# EAGLE board mbhp_core_stm32_R1b (EAGLE 5.04)
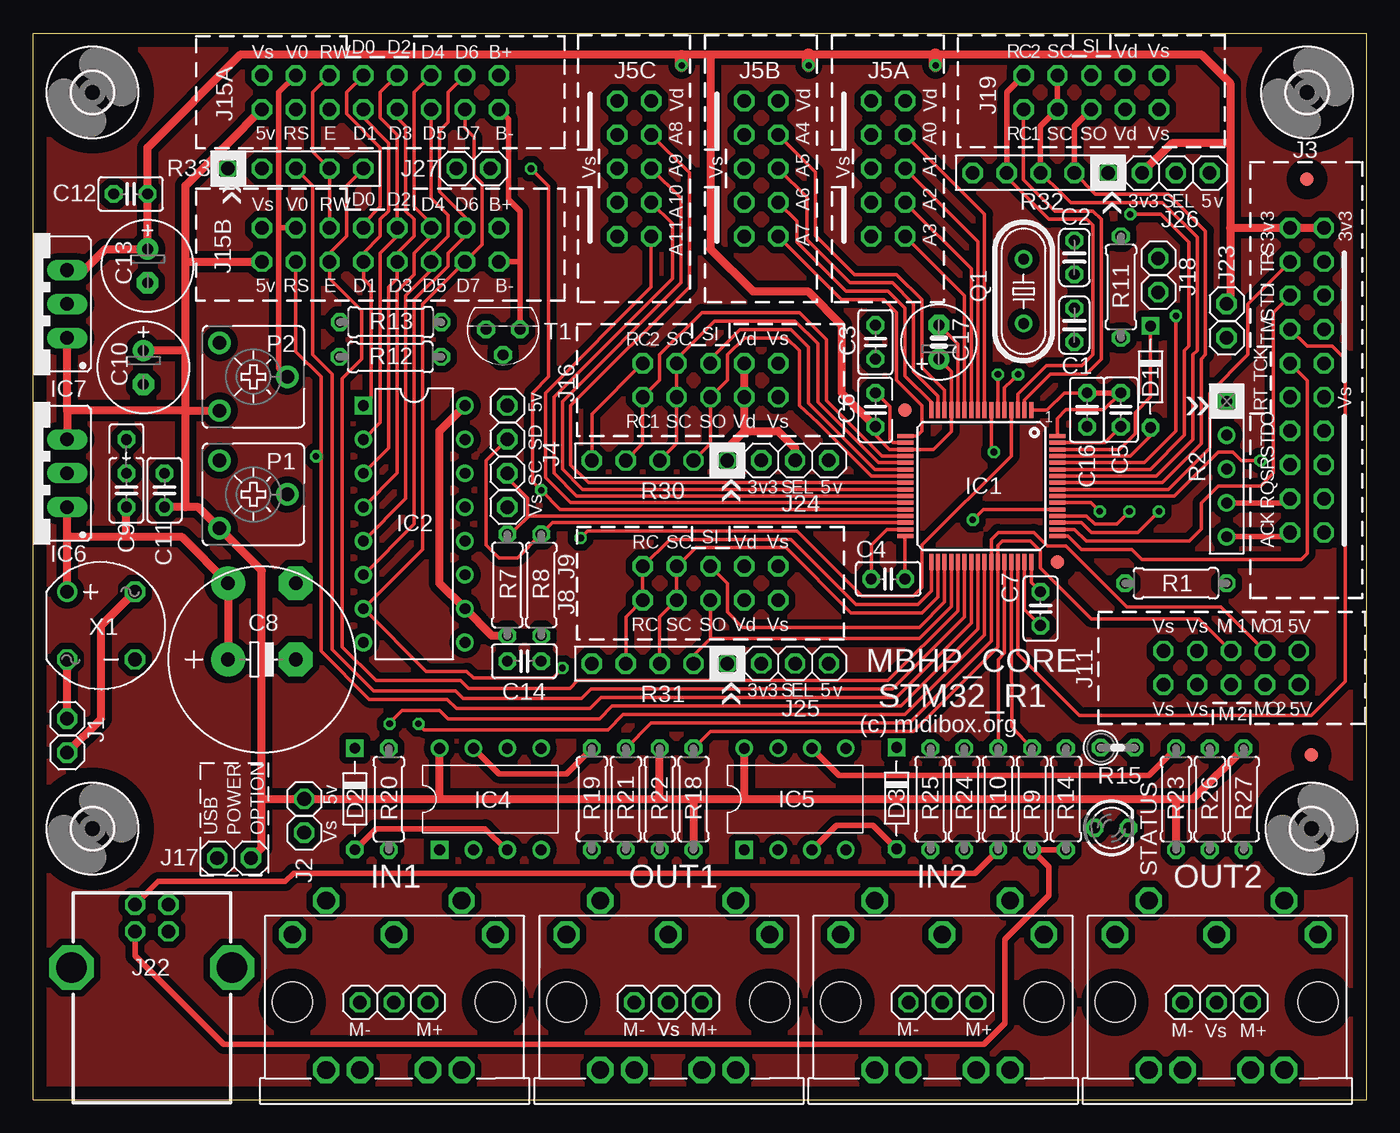
[diagram p0: board, top side]
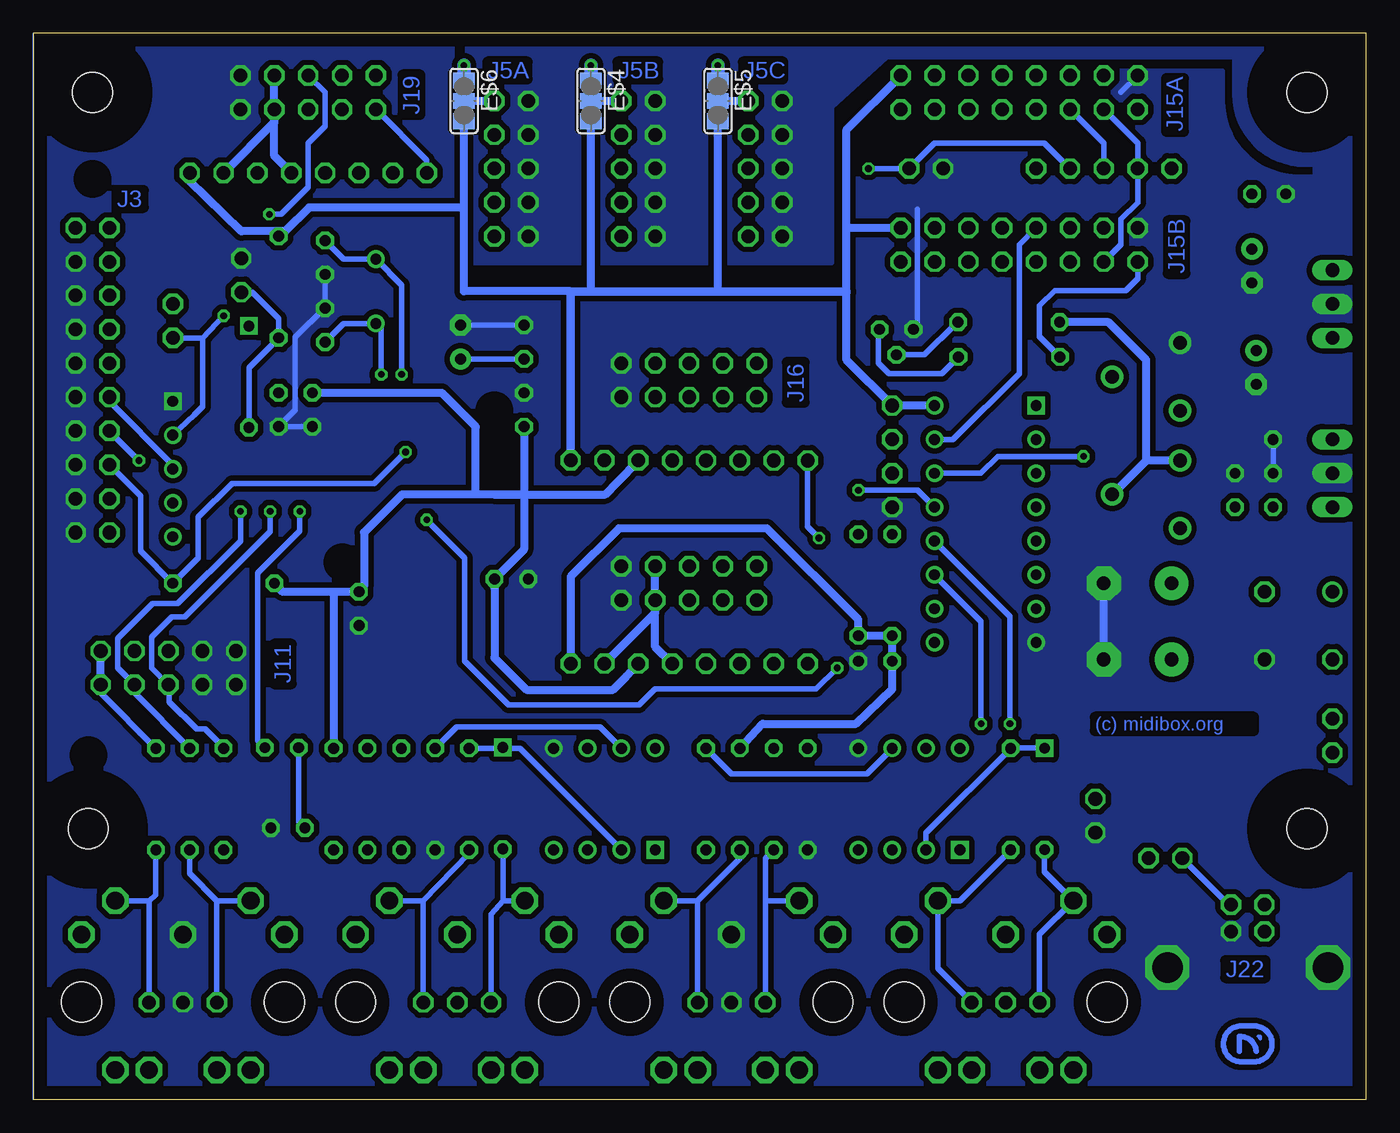
[diagram p1: board, bottom side, seen from below]

Size 100 x 80 mm. Coordinates in mm from the lower left corner, seen from the top.
Outline: 0,0 0,80 100,80 100,0 0,0
Copper layers (1*16): Top 0.035mm / dielectric 1.5mm / Bottom 0.035mm
Design rules "default *": minimum track width 10mil, minimum drill 18mil, track to track 8mil, track to pad 8mil, pad to pad 8mil, via to via 8mil, smd to smd 8mil, copper to edge 40mil, drill to drill 8mil, minimum pad ring 10mil, minimum via ring 8mil, stop-mask expansion 4mil, vias tented up to drill 25mil, thermal gap 10mil

## Footprints (pad centres in the part's own frame; a part is rotated, then mirrored left to right if it is on the bottom)
C025-024X044 = drill 0.813 octagon: 1 -1.27,0; 2 1.27,0
C025-025X050 = drill 0.813 octagon: 1 -1.27,0; 2 1.27,0
C025_050-025X075_EDIT = drill 0.813 octagon: 1 -1.27,0; 2 1.27,0
E5-13 = drill 1.016 pad 2.54 round: + -2.54,0 | drill 1.016 pad 2.54 octagon: - 2.54,0
E2,5-7 = drill 0.813 pad 1.6 round: + -1.27,0 | drill 0.813 pad 1.6 octagon: - 1.27,0
E2,5-6 = drill 0.813 pad 1.6 round: + -1.27,0 | drill 0.813 pad 1.6 octagon: - 1.27,0
D-7EDIT4148 = drill 0.813 octagon: NS 3.81,0 | drill 0.813 square: S -3.81,0
2X05NOSILK = drill 1.016 octagon: 1 -5.08,-1.27; 2 -5.08,1.27; 3 -2.54,-1.27; 4 -2.54,1.27; 5 0,-1.27; 6 0,1.27; 7 2.54,-1.27; 8 2.54,1.27; 9 5.08,-1.27; 10 5.08,1.27
SJ_2 = smd 1.168 x 1.6: 1 -1.524,0; 2 0,0; 3 1.524,0
2X08NOSILK = drill 1.016 octagon: 1 -8.89,-1.27; 2 -8.89,1.27; 3 -6.35,-1.27; 4 -6.35,1.27; 5 -3.81,-1.27; 6 -3.81,1.27; 7 -1.27,-1.27; 8 -1.27,1.27; 9 1.27,-1.27; 10 1.27,1.27; 11 3.81,-1.27; 12 3.81,1.27; 13 6.35,-1.27; 14 6.35,1.27; 15 8.89,-1.27; 16 8.89,1.27
2X10NOSILK = drill 1.016 octagon: 1 -11.43,-1.27; 2 -11.43,1.27; 3 -8.89,-1.27; 4 -8.89,1.27; 5 -6.35,-1.27; 6 -6.35,1.27; 7 -3.81,-1.27; 8 -3.81,1.27; 9 -1.27,-1.27; 10 -1.27,1.27; 11 1.27,-1.27; 12 1.27,1.27; 13 3.81,-1.27; 14 3.81,1.27; 15 6.35,-1.27; 16 6.35,1.27; 17 8.89,-1.27; 18 8.89,1.27; 19 11.43,-1.27; 20 11.43,1.27
1X01 = drill 1.016 octagon: 1 0,0
C025_050-025X075 = drill 0.813 octagon: 1 -1.27,0; 2 1.27,0; 3 3.81,0
TQFP64 = smd 1.2 x 0.3: 1 -5.7,3.75; 2 -5.7,3.25; 3 -5.7,2.75; 4 -5.7,2.25; 5 -5.7,1.75; 6 -5.7,1.25; 7 -5.7,0.75; 8 -5.7,0.25; 9 -5.7,-0.25; 10 -5.7,-0.75; 11 -5.7,-1.25; 12 -5.7,-1.75; 13 -5.7,-2.25; 14 -5.7,-2.75; 15 -5.7,-3.25; 16 -5.7,-3.75; 33 5.7,-3.75; 34 5.7,-3.25; 35 5.7,-2.75; 36 5.7,-2.25; 37 5.7,-1.75; 38 5.7,-1.25; 39 5.7,-0.75; 40 5.7,-0.25; 41 5.7,0.25; 42 5.7,0.75; 43 5.7,1.25; 44 5.7,1.75; 45 5.7,2.25; 46 5.7,2.75; 47 5.7,3.25; 48 5.7,3.75 | smd 0.3 x 1.2: 17 -3.75,-5.7; 18 -3.25,-5.7; 19 -2.75,-5.7; 20 -2.25,-5.7; 21 -1.75,-5.7; 22 -1.25,-5.7; 23 -0.75,-5.7; 24 -0.25,-5.7; 25 0.25,-5.7; 26 0.75,-5.7; 27 1.25,-5.7; 28 1.75,-5.7; 29 2.25,-5.7; 30 2.75,-5.7; 31 3.25,-5.7; 32 3.75,-5.7; 49 3.75,5.7; 50 3.25,5.7; 51 2.75,5.7; 52 2.25,5.7; 53 1.75,5.7; 54 1.25,5.7; 55 0.75,5.7; 56 0.25,5.7; 57 -0.25,5.7; 58 -0.75,5.7; 59 -1.25,5.7; 60 -1.75,5.7; 61 -2.25,5.7; 62 -2.75,5.7; 63 -3.25,5.7; 64 -3.75,5.7
DIL16 = drill 0.813 square: 1 -8.89,-3.81 | drill 0.813 round: 2 -6.35,-3.81; 3 -3.81,-3.81; 4 -1.27,-3.81; 5 1.27,-3.81; 6 3.81,-3.81; 7 6.35,-3.81; 8 8.89,-3.81; 9 8.89,3.81; 10 6.35,3.81; 11 3.81,3.81; 12 1.27,3.81; 13 -1.27,3.81; 14 -3.81,3.81; 15 -6.35,3.81; 16 -8.89,3.81
DIL08 = drill 0.813 square: 1 -3.81,-3.81 | drill 0.813 round: 2 -1.27,-3.81; 3 1.27,-3.81; 4 3.81,-3.81; 5 3.81,3.81; 6 1.27,3.81; 7 -1.27,3.81; 8 -3.81,3.81
78XXS = drill 1.016 long: GND 0,-2.54; IN -2.54,-2.54; OUT 2.54,-2.54
MAB5SH = drill 1.321 octagon: 1 7.62,5.08; 2 0,5.08; 3 -7.62,5.08; 4 5.08,7.62; 5 -5.08,7.62; A -5.08,-5.08; B -2.54,-5.08; C 2.54,-5.08; D 5.08,-5.08 | hole 2.997: 7.62,0; -7.62,0
PN61729-S = drill 1.016 octagon: 1 1.25,4.71; 2 -1.25,4.71; 3 -1.25,2.71; 4 1.25,2.71 | drill 2.3 pad 2.9 octagon: S1 -6.02,0; S2 6.02,0
TP10R_EDIT1 = smd 1 x 1: TP 0,0
CA6V = drill 1.016 pad 1.676 round: A -2.54,-2.54; E 2.54,-2.54; S 0,2.54
HC49/S = drill 0.813 round: 1 -2.413,0; 2 2.413,0
0207/7 = drill 0.813 octagon: 1 -3.81,0; 2 3.81,0
RN-5 = drill 0.813 square: 1 -5.08,0 | drill 0.813 round: 2 -2.54,0; 3 0,0; 4 2.54,0; 5 5.08,0
0207/2V = drill 0.813 octagon: 1 -1.27,0; 2 1.27,0
RN-5EDIT = drill 1.016 octagon: 1 -5.08,0; 2 -2.54,0; 3 0,0; 4 2.54,0; 5 5.08,0
LED3MM = drill 0.813 octagon: A -1.27,0; K 1.27,0
TO92 = drill 0.813 octagon: 1 1.27,0; 2 0,1.905; 3 -1.27,0
3,0 = hole 3: 0,0
RB1A = drill 1.016 round: + -2.54,2.54 | drill 1.016 octagon: - 2.54,-2.54; AC1 2.54,2.54; AC2 -2.54,-2.54

## Placement (x,y rotation side)
C1  33pF  [C025-024X044]  78.11,58.1 90 top
C2  33pF  [C025-024X044]  78.11,63.18 270 top
C3  100n  [C025-025X050]  63.18,56.83 90 top
C4  100n  [C025-025X050]  64.14,39.05 180 top
C5  100n  [C025-025X050]  81.6,51.75 270 top
C6  100n  [C025_050-025X075_EDIT]  63.18,51.75 90 top
C7  100n  [C025-025X050]  75.56,36.83 270 top
C8  2200u  [E5-13]  17.14,33.02 0 top
C10  47u  [E2,5-7]  8.26,54.93 270 top
C11  100n  [C025-025X050]  9.84,45.72 90 top
C12  100n  [C025-025X050]  7.3,67.94 180 top
C13  100u  [E2,5-7]  8.57,62.55 270 top
C14  100n  [C025-025X050]  36.83,32.89 0 top
C16  100n  [C025-025X050]  79.06,51.75 90 top
C17  47u  [E2,5-6]  67.94,56.83 90 top
D1  1N4148  [D-7EDIT4148]  83.82,54.23 270 top
D2  1N4148  [D-7EDIT4148]  24.13,22.56 270 top
D3  1N4148  [D-7EDIT4148]  64.77,22.61 270 top
E$1  [2X05NOSILK]  64.14,69.85 90 top
E$2  [2X05NOSILK]  54.61,69.85 90 top
E$3  [2X05NOSILK]  45.09,69.85 90 top
E$4  [SJ_2]  58.17,74.93 270 bottom
E$5  [SJ_2]  48.64,74.93 270 bottom
E$6  [SJ_2]  67.69,74.93 270 bottom
E$7  [2X05NOSILK]  50.8,53.98 180 top
E$8  [2X05NOSILK]  79.38,75.56 180 top
E$9  [2X05NOSILK]  89.87,32.38 180 top
E$10  [2X05NOSILK]  50.8,38.73 180 top
E$11  [2X08NOSILK]  26.04,64.14 0 top
E$12  [2X08NOSILK]  26.04,75.56 0 top
E$13  [2X10NOSILK]  95.55,53.98 90 top
E$14  [1X01]  31.75,69.85 0 top
E$15  [1X01]  34.29,69.85 0 top
E$16  [1X01]  2.54,28.57 0 top
E$17  [1X01]  2.54,26.04 0 top
E$18  [1X01]  13.79,18.11 0 top
E$19  [1X01]  16.33,18.11 0 top
E$20  [1X01]  20.32,20.02 0 top
E$21  [1X01]  20.32,22.56 0 top
E$22  [1X01]  54.61,32.72 0 top
E$23  [1X01]  57.15,32.72 0 top
E$24  [1X01]  59.69,32.72 0 top
E$25  [1X01]  54.61,47.96 0 top
E$26  [1X01]  57.15,47.96 0 top
E$27  [1X01]  59.69,47.96 0 top
E$28  [1X01]  83.19,69.52 0 top
E$29  [1X01]  85.72,69.52 0 top
E$30  [1X01]  88.27,69.52 0 top
E$31  [1X01]  89.53,59.69 0 top
E$32  [1X01]  89.53,57.15 0 top
E$33  [1X01]  35.56,44.45 0 top
E$34  [1X01]  35.56,46.99 0 top
E$35  [1X01]  35.56,49.53 0 top
E$36  [1X01]  35.56,52.07 0 top
E$37  [1X01]  84.4,60.58 0 top
E$38  [1X01]  84.4,63.12 0 top
E$39  [1X01]  24.51,7.29 0 top
E$40  [1X01]  27.05,7.29 0 top
E$41  [1X01]  29.59,7.29 0 top
E$42  [1X01]  45.09,7.29 0 top
E$43  [1X01]  47.62,7.29 0 top
E$44  [1X01]  50.16,7.29 0 top
E$45  [1X01]  65.66,7.29 0 top
E$46  [1X01]  68.2,7.29 0 top
E$47  [1X01]  70.74,7.29 0 top
E$48  [1X01]  86.23,7.29 0 top
E$49  [1X01]  88.77,7.29 0 top
E$50  [1X01]  91.31,7.29 0 top
E$51  330n  [C025_050-025X075]  6.99,45.72 90 top
E$52  [2X05BORDER]  64.14,69.85 90 top
E$53  [2X05BORDER]  54.61,69.85 90 top
E$54  [2X05BORDER]  45.09,69.85 90 top
E$55  [2X05BORDER]  50.8,53.98 0 top
E$56  [2X05BORDER]  50.8,38.73 0 top
E$57  [2X05BORDER]  89.92,32.38 180 top
E$58  [2X08BORDER]  26.04,75.56 0 top
E$59  [2X08BORDER]  26.04,64.14 0 top
E$60  [2X10BORDER]  95.5,53.98 270 top
E$61  [2X10BORDER]  95.5,53.98 270 top
E$62  [2X05BORDER]  79.38,75.64 0 top
IC1  STM32F10XRXT6  [TQFP64]  71.12,46.04 270 top
IC2  74HC595  [DIL16]  28.57,43.18 270 top
IC4  6N138  [DIL08]  34.29,22.54 0 top
IC5  6N138  [DIL08]  57.15,22.54 0 top
IC6  7805  [78XXS]  0,46.99 90 top
IC7  LF33  [78XXS]  0,59.69 90 top
J12_2  MAB5SH  [MAB5SH]  47.62,7.3 0 top
J13_2  MAB5SH  [MAB5SH]  27.05,7.3 0 top
J20_2  MAB5SH  [MAB5SH]  88.77,7.3 0 top
J21_2  MAB5SH  [MAB5SH]  68.2,7.3 0 top
J22  [PN61729-S]  8.89,9.91 0 top
NE_FIDUCIAL_PCB  [TP10R_EDIT1]  95.56,69.07 0 top
NW_FIDUCIAL_IC1  [TP10R_EDIT1]  65.41,51.73 0 top
P1  10k  [CA6V]  16.51,45.4 270 top
P2  10k  [CA6V]  16.51,54.23 270 top
Q1  12Mhz  [HC49/S]  74.3,60.64 270 top
R1  100k  [0207/7]  85.72,38.73 180 top
R2  10k  [RN-5]  89.53,47.31 270 top
R7  2k2  [0207/7]  35.56,38.61 270 top
R8  2k2  [0207/7]  38.1,38.61 270 top
R9  27  [0207/7]  74.93,22.54 90 top
R10  27  [0207/7]  72.39,22.54 90 top
R11  1k  [0207/7]  81.6,60.96 90 top
R12  10k  [0207/7]  26.78,55.71 180 top
R13  1k  [0207/7]  26.81,58.33 180 top
R14  1k  [0207/7]  77.47,22.54 90 top
R15  470  [0207/2V]  81.36,26.4 0 top
R18  1k  [0207/7]  49.53,22.54 270 top
R19  4k7  [0207/7]  41.91,22.54 90 top
R20  220  [0207/7]  26.67,22.54 270 top
R21  220  [0207/7]  44.45,22.54 270 top
R22  220  [0207/7]  46.99,22.54 270 top
R23  1k  [0207/7]  85.72,22.54 270 top
R24  4k7  [0207/7]  69.85,22.54 90 top
R25  220  [0207/7]  67.31,22.54 270 top
R26  220  [0207/7]  88.27,22.54 270 top
R27  220  [0207/7]  90.81,22.54 270 top
R30  1k  [RN-5EDIT]  46.99,47.94 180 top
R31  220  [RN-5EDIT]  46.99,32.7 180 top
R32  1k  [RN-5EDIT]  75.56,69.53 180 top
R33  1k  [RN-5EDIT]  19.68,69.85 0 top
SE_FIDUCIAL_IC1  [TP10R_EDIT1]  76.83,40.32 0 top
SE_FIDUCIAL_PCB  [TP10R_EDIT1]  95.88,25.84 0 top
STATUS  green  [LED3MM]  80.9,20.38 0 top
T1  BC337  [TO92]  35.24,57.78 180 top
U$1  [3,0]  95.57,75.56 0 top
U$3  [3,0]  4.45,75.56 0 top
U$4  [3,0]  4.45,20.32 0 top
U$5  [3,0]  95.89,20.32 0 top
X1  B40C800  [RB1A]  5.08,35.56 0 top

## Library data of the parts
C1-C8 C10-C14 C16 C17 E$51 R7 R8 R11-R13 R15 = rcl
D1-D3 = diode
E$1-E$3 E$7-E$50 E$52-E$62 = pinhead
E$4-E$6 = jumper
IC1 = stm32
IC2 = 74xx-eu
IC4 IC5 = optocoupler
IC6 IC7 = v-reg
J12_2 J13_2 J20_2 J21_2 = con-hirschmann
J22 = con-berg
NE_FIDUCIAL_PCB NW_FIDUCIAL_IC1 SE_FIDUCIAL_IC1 SE_FIDUCIAL_PCB = testpad
P1 P2 = pot
Q1 = crystal
R1 R9 R10 R14 R18-R27 = midibox
R2 R30-R33 = resistor-net
STATUS = led
T1 = transistor
U$1 U$3-U$5 = holes
X1 = rectifier

## Nets
+3.3V: C3.1 C4.1 C5.1 C6.1 C7.1 C12.1 C13.+ C16.2 C17.+ E$1.9 E$2.9 E$3.9 E$4.1 E$4.2 E$5.1 E$5.2 E$6.1 E$6.2 E$13.19 E$13.20 E$22.1 E$25.1 E$28.1 E$31.1 IC1.1 IC1.13 IC1.19 IC1.32 IC1.48 IC1.64 IC7.OUT R1.2 R14.2
+5V: C10.+ C11.1 C14.1 E$4.3 E$5.3 E$6.3 E$9.1 E$9.2 E$11.1 E$11.16 E$12.1 E$12.16 E$19.1 E$21.1 E$24.1 E$27.1 E$30.1 E$36.1 IC2.10 IC2.16 IC4.8 IC5.8 IC6.OUT IC7.IN P1.E P2.E R7.2 R8.2 R11.2 R12.2 R18.2 R22.1 R23.2 R27.1 R33.1
B-: E$11.15 E$12.15 R12.1 T1.3
BOOT0: E$32.1 IC1.60 R2.2
D0: E$11.8 E$12.8 IC2.15
D1: E$11.7 E$12.7 IC2.1
D2: E$11.10 E$12.10 IC2.2
D3: E$11.9 E$12.9 IC2.3
D4: E$11.12 E$12.12 IC2.4
D5: E$11.11 E$12.11 IC2.5
D6: E$11.14 E$12.14 IC2.6
GND: C1.2 C2.2 C3.2 C4.2 C5.2 C6.2 C7.2 C8.- C10.- C11.2 C12.2 C13.- C14.2 C16.1 C17.- E$1.2 E$1.4 E$1.6 E$1.8 E$1.10 E$2.2 E$2.4 E$2.6 E$2.8 E$2.10 E$3.2 E$3.4 E$3.6 E$3.8 E$3.10 E$7.1 E$7.2 E$8.1 E$8.2 E$9.7 E$9.8 E$9.9 E$9.10 E$10.1 E$10.2 E$11.2 E$12.2 E$13.1 E$13.3 E$13.5 E$13.7 E$13.9 E$13.11 E$13.13 E$13.15 E$13.17 E$14.1 E$20.1 E$33.1 E$38.1 E$43.1 E$49.1 E$51.2 E$51.3 IC1.12 IC1.18 IC1.31 IC1.47 IC1.63 IC2.8 IC4.5 IC5.5 IC6.GND IC7.GND J12_2.2 J20_2.2 J22.4 J22.S1 J22.S2 P2.A R2.1 R19.1 R24.1 STATUS.K T1.1 X1.-
N$1: R15.1 STATUS.A
N$2: E$7.3 E$7.4 E$26.1 R30.1
N$4: D2.NS E$39.1 IC4.3 J13_2.5
N$5: E$10.3 E$10.4 E$23.1 R31.1
N$7: C8.+ E$51.1 IC6.IN X1.+
N$17: E$18.1 J22.1
N$31: E$17.1 X1.AC1
N$35: E$13.2 R2.5
N$56: E$44.1 J12_2.4 R22.2
N$57: E$42.1 J12_2.5 R21.2
N$59: IC4.7 R19.2
N$60: E$41.1 J13_2.4 R20.2
N$61: D2.S IC4.2 R20.1
N$62: E$16.1 X1.AC2
N$64: E$50.1 J20_2.4 R27.2
N$65: E$48.1 J20_2.5 R26.2
N$67: IC5.7 R24.2
N$68: D3.S IC5.2 R25.1
N$69: D3.NS E$45.1 IC5.3 J21_2.5
N$70: E$47.1 J21_2.4 R25.2
N$72: R13.1 T1.2
N$73: P1.A P1.S R13.2
N$74: E$11.4 E$12.4 P2.S
N$83: E$13.4 R2.4
N$84: E$13.10 R2.3
NRST: E$13.6 IC1.7 R1.1
PA0: E$2.7 IC1.14
PA1: E$2.5 IC1.15
PA2: E$2.3 IC1.16
PA3: E$2.1 IC1.17
PA4: E$7.10 IC1.20 R30.4
PA5: E$7.7 E$7.8 IC1.21 R30.3
PA6: E$7.5 IC1.22
PA7: E$7.6 IC1.23 R30.2
PA8: IC1.41 IC2.11
PA9: E$9.3 IC1.42 R21.1
PA10: E$9.5 IC1.43 IC4.6 R18.1
PA11: IC1.44 R10.2
PA12: IC1.45 R9.2
PA13: E$13.14 IC1.46
PA14: E$13.12 IC1.49
PA15: E$13.16 IC1.50
PB0: E$3.3 IC1.26
PB1: E$3.1 IC1.27
PB2: E$11.6 E$12.6 E$15.1 IC1.28 IC2.13 R33.4
PB3: E$13.8 IC1.55
PB4: E$13.18 IC1.56
PB5: E$8.6 IC1.57 R32.2
PB6: E$8.7 E$8.8 IC1.58 R32.3
PB7: E$8.5 IC1.59
PB8: D1.NS E$37.1 IC1.61 R11.1
PB9: D1.S IC1.62
PB10: E$34.1 IC1.29 R7.1
PB11: E$35.1 IC1.30 R8.1
PB12: E$10.9 E$10.10 IC1.33 R31.4
PB13: E$10.7 E$10.8 IC1.34 R31.3
PB14: E$10.5 IC1.35
PB15: E$10.6 IC1.36 R31.2
PC0: E$1.7 IC1.8
PC1: E$1.5 IC1.9
PC2: E$1.3 IC1.10
PC3: E$1.1 IC1.11
PC4: E$3.7 IC1.24
PC5: E$3.5 IC1.25
PC6: E$11.5 IC1.37 R33.5
PC7: E$12.5 IC1.38 R33.3
PC8: E$11.3 E$12.3 IC1.39 IC2.14 R33.2
PC9: IC1.40 IC2.12
PC10: E$9.4 IC1.51 R26.1
PC11: E$9.6 IC1.52 IC5.6 R23.1
PC12: E$11.13 E$12.13 IC1.53 IC2.7
PC13: E$8.10 IC1.2 R32.5
PC14: E$8.9 IC1.3 R32.4
PC15: E$7.9 IC1.4 R30.5
PD0: C1.1 IC1.5 Q1.2
PD1: C2.1 IC1.6 Q1.1
PD2: IC1.54 R15.2
S$5: E$8.3 E$8.4 E$29.1 R32.1
USB1: J22.2 R10.1
USB2: J22.3 R9.1 R14.1

## Tracks (layer width: path | path; a pad name or v marks a point on that pad's centre or on a via)
+3.3V  (via drill 0.5)
  Top 0.254: C17.+ 68.87,54.64 IC1.13 68.87,50.14 67.52,48.79 IC1.19 64.24,48.79 63.25,49.78 63.25,50.48 C6.1 | IC1.64 76.82,51.1 77.47,51.75 80.33,51.75 C5.1 | IC1.32 65.41,42.27 C4.1 | IC1.1 76.06,51.74 77.34,53.02 C16.2 | IC1.48 74.87,38.8 C7.1
  Top 0.406: C16.2 C5.1 | 83.19,69.53 E$28.1 | E$13.20 94.23,65.41 | 96.84,65.41 96.83,65.41 E$13.19 | 48.64,78.42 48.64,78.23 | 50.8,78.42 50.86,78.36 58.17,78.36 | 67.69,77.72 67.69,78.36 67.69,78.42
  Top 0.61: 96.84,65.41 94.3,65.41 | 94.3,65.41 | E$31.1 89.79,59.94 89.79,65.41 | 94.3,65.41 94.23,65.41 89.79,65.41 | C6.1 60.64,53.02 60.64,58.1 58.1,60.64 53.98,60.64 50.8,63.82 50.8,78.42 | 83.19,69.53 85.41,71.75 89.79,71.75 | 89.79,71.75 89.79,65.41 | 89.79,71.75 89.79,76.26 87.63,78.42 67.69,78.42 50.8,78.42 | 50.8,78.42 48.64,78.42 15.56,78.42 8.57,71.44 C12.1 C13.+ 5.4,63.82 3.81,62.23 IC7.OUT
  Top 1.016: 67.69,78.36 arc0 v67.69,77.6 | 48.64,78.23 arc0 v48.64,77.6 | 58.17,78.36 arc0 v58.17,77.6
  Bottom 0.406: C17.+ C3.1 | 54.61,32.7 E$22.1 | 54.61,47.94 E$25.1 | E$1.9 E$6.2 v67.69,77.6
  Bottom 0.61: 54.61,32.7 55.5,31.75 56.52,30.73 62.99,30.73 65.41,33.15 C4.1 | R1.2 81.28,38.1 C7.1 | C7.1 77.47,38.1 R14.2 | 54.61,47.94 56.13,46.35 57.09,45.4 63.25,45.4 | C7.1 75.18,38.48 75.18,42.55 72.33,45.4 66.8,45.4 | C4.1 65.41,38.42 | C16.2 69.34,53.02 66.8,50.48 66.8,45.4 | E$6.1 E$6.2 E$1.9 | E$5.1 E$5.2 E$3.9 | E$4.1 E$4.2 E$2.9 | C6.1 63.18,45.47 63.25,45.4 | 63.25,45.4 65.47,45.4 | 65.47,45.4 66.8,45.4 | 65.47,45.4 63.2,45.4 63.2,41.26 C4.1
  Bottom 1.016: v67.69,77.6 arc0 E$6.1 | v48.64,77.6 E$5.1 | v58.17,77.6 arc0 E$4.1
+5V
  Top 0.406: E$19.1 16.35,18.11 16.35,18.1 | E$21.1 20.19,22.55 20.19,22.54
  Top 0.61: 14.61,71.75 E$12.1 | 11.43,60.33 11.43,62.87 E$11.1 | 30.48,22.54 46.99,22.54 | 46.99,22.54 49.53,22.54 | 49.53,22.54 53.34,22.54 | 16.35,18.1 17.14,18.89 17.14,22.54 | 30.48,22.54 IC4.8 | 46.99,22.54 R22.1 | 49.53,22.54 R18.2 | 53.34,22.54 85.72,22.54 | 11.43,51.69 P2.E | IC2.16 30.48,50.16 30.48,38.73 IC2.10 34.42,34.8 R7.2 | 20.19,22.54 30.48,22.54 | 17.14,22.54 20.19,22.54 | 20.19,22.54 20.32,22.54 | 17.14,22.54 17.14,39.69 P1.E 12.38,44.45 11.43,44.45 | 11.43,60.33 11.43,68.58 14.61,71.75 | 14.61,71.75 13.65,70.8 R33.1 | 11.43,44.45 11.43,51.69 | 11.43,51.69 11.43,56.2 | 11.43,56.2 11.43,60.33 | 11.43,51.69 2.54,51.69 | 2.54,51.69 IC6.OUT | 2.54,51.69 IC7.IN | 11.43,56.2 C10.+ | 85.72,22.54 R23.2 | 11.43,44.45 C11.1 | 53.34,22.54 IC5.8 | 85.72,22.54 87,22.54 R27.1
  Bottom 0.406: 48.64,73.28 E$5.3 | E$11.1 17.14,61.59 18.03,60.71 23.37,60.71 24.51,59.56 24.51,57.25 R12.2 | R11.2 81.6,64.96 81.41,65.15 | E$9.2 94.94,30.49 R27.1
  Bottom 0.61: E$12.16 38.99,72.77 38.99,65.41 | IC2.10 32.07,36.83 | 38.99,65.41 E$11.16 | R22.1 45.28,28.19 38.29,28.19 35.56,30.8 C14.1 R7.2 R8.2 38.1,36.01 44.96,42.86 56.07,42.86 59.69,39.24 E$24.1 59.69,32.7 | IC2.16 E$36.1 38.99,55.5 38.99,60.58 59.69,60.58 E$27.1 | 59.69,60.64 59.69,48.01 E$27.1 | E$27.1 59.69,47.94 | 38.99,65.41 38.99,60.64 48.64,60.64 | 59.69,60.64 58.17,60.64 | 59.69,60.64 67.69,60.64 67.69,66.93 | 58.17,60.64 48.64,60.64 | 48.64,60.64 48.64,73.28 | 58.17,60.64 E$4.3 | E$9.2 E$9.1 | 67.69,66.93 E$6.3 | 67.69,66.93 79.31,66.93 81.09,65.15 81.41,65.15 84.39,65.15 88.27,68.9 E$30.1
B-
  Top 0.406: T1.3 36.51,62.87 | 36.51,62.87 E$11.15 | 36.51,62.87 36.51,66.67 35.66,67.53 35.66,73.56 E$12.15
  Bottom 0.406: R12.1 31.83,54.48 35.81,54.48 36.58,55.24 36.58,57.28 36.51,57.34 T1.3
BOOT0  (via drill 0.5)
  Top 0.254: IC1.60 83.35,47.79 85.72,50.16 v85.72,58.8
  Bottom 0.406: v85.72,58.8 87.31,57.15 | 87.31,57.15 E$32.1 | R2.2 87.95,51.37 87.31,52.01 87.31,57.15
D0
  Top 0.254: E$11.8 24.77,65.72 26.04,66.99 26.04,71.44 23.5,73.98 23.5,75.56 | 23.5,75.56 E$12.8 | 23.5,75.56 23.5,74.04
  Bottom 0.406: E$11.8 26.04,64.14 26.04,55.88 26.04,54.48 30.99,49.53 IC2.15
D1
  Top 0.254: E$12.7 24.77,73.66 26.67,71.75 26.67,66.67 26.04,66.04 26.04,64.77 24.77,63.5 E$11.7 24.77,61.59 25.35,61.01 25.35,52.65 IC2.1
D2
  Top 0.254: IC2.2 26.04,50.8 26.04,63.5 27.3,64.77 E$11.10 27.3,72.39 26.04,73.66 26.04,75.56 E$12.10
D3
  Top 0.254: IC2.3 26.67,48.9 26.67,60.96 27.3,61.59 E$11.9 27.3,63.5 28.57,64.77 28.57,66.04 27.94,66.67 27.94,73.03 27.3,73.66 E$12.9
D4
  Top 0.254: IC2.4 27.3,46.99 27.3,60.64 28.57,61.91 28.57,63.5 29.84,64.77 E$11.12 29.84,65.72 28.57,66.99 28.57,75.56 E$12.12
D5
  Top 0.254: IC2.5 27.94,45.09 27.94,60.33 29.84,62.23 E$11.11 29.84,63.5 31.11,64.77 31.11,66.36 29.84,67.63 29.84,69.53 E$12.11
D6
  Top 0.254: IC2.6 28.57,43.18 28.57,60.01 31.11,62.55 31.11,63.5 32.38,64.77 32.38,66.04 | E$12.14 31.11,75.56 31.11,73.34 30.48,72.71 30.48,68.1 32.38,66.2 32.38,66.04 | 32.38,66.04 E$11.14
GND  (via drill 1.02 pad 2.54)
  Top 0.254: C5.2 80.4,49.29 IC1.63 | IC1.47 74.37,36.76 C7.2 | C6.2 63.25,53.02 64.26,52.01 64.26,49.53 64.5,49.29 IC1.18 | IC1.31 64.06,42.79 62.87,41.59 C4.2 | IC1.12 69.37,56.68 C17.-
  Bottom 0.406: C5.2 C16.1 | E$12.2 18.41,75.56 | E$51.2 E$51.3 | C3.2 C17.- | C2.2 78.11,59.44 80.34,57.2 80.34,51.74 81.58,50.49 81.58,50.44 | T1.1 33.66,58.1 33.66,66.8
  Bottom 0.61: C8.- v19.68,38.73 | 78.11,59.44 C1.2
  pour Bottom (isolate 0.406, no thermals): 10.79,77.15 39.88,77.15 39.75,60.64 68.58,60.64 68.58,80.01 100.01,79.88 100.01,-0.13 0,0 0,69.22 5.08,69.22 arc90 10.79,74.93
  pour Bottom (isolate 0.406, no thermals): 0,80.01 67.44,80.01 67.56,62.8 40.13,62.8 40.13,74.45 35.94,78.23 9.84,78.23 9.84,75.41 arc-90 4.6,70.17 3.81,70.17 3.81,69.22 0,69.22
N$1
  Bottom 0.406: R15.1 80.09,20.84 STATUS.A
N$2
  Top 0.61: E$7.3 E$7.4 53.34,50.16 | R30.1 52.07,48.9 53.34,50.16 | 57.15,47.94 E$26.1 57.15,48.01 57.15,48.9 55.88,50.16 53.34,50.16
N$3
  Bottom 0.254: 7.94,4.73 7.94,4.57 8.1,4.73 7.94,4.73
N$4
  Top 0.406: D2.NS 25.7,20.32 33.91,20.32 35.5,18.73 IC4.3
  Bottom 0.406: E$39.1 24.51,12.38 J13_2.5 24.13,17.08 D2.NS
N$5
  Bottom 0.406: 57.15,32.7 E$23.1
  Bottom 0.61: E$10.3 E$10.4 53.34,36.96 | 57.15,32.7 53.34,36.51 53.34,36.96 | R31.1 53.34,33.97 53.34,36.96
N$6
  Bottom 0.406: 9.37,2.83 arc180 9.37,5.53 8.41,5.53 arc180 8.41,2.83 9.37,2.83
N$7  (via drill 1.02 pad 2.54)
  Top 0.61: v14.61,38.73 C8.+ | v14.61,38.73 C8.+ | 6.99,42.23 11.11,42.23 v14.61,38.73 | v14.61,38.73 C8.+ | 2.54,42.55 X1.+ 2.54,42.23 | 2.54,42.55 2.54,42.23 | 2.54,42.55 IC6.IN | 2.54,42.23 6.99,42.23 | 6.99,42.23 E$51.1 | v14.61,38.73 C8.+
N$8
  Bottom 0.406: 9.53,3.62 9.53,4.73 arc90 8.26,3.62
N$17
  Bottom 0.406: J22.1 10.3,14.62 E$18.1
N$31
  Top 0.61: E$17.1 5.08,28.57 5.08,35.56 X1.AC1
N$35
  Top 0.254: 94.3,42.55
  Top 0.406: R2.5 93.98,42.23 94.3,42.55 E$13.2
N$56
  Bottom 0.406: 50.16,14.92 J12_2.4 | R22.2 46.99,18.1 50.16,14.92 | E$44.1 50.16,14.92
N$57
  Bottom 0.406: 45.09,14.92 J12_2.5 | 45.09,14.92 45.09,18.1 R21.2 | E$42.1 45.09,14.92
N$59
  Top 0.406: IC4.7 34.92,24.45 40.01,24.45 R19.2
N$60
  Bottom 0.406: R20.2 30.48,14.92 J13_2.4 32.13,9.83 E$41.1
N$61
  Bottom 0.406: IC4.2 33.02,20 R20.1 26.67,26.36 D2.S
N$62
  Top 0.61: E$16.1 X1.AC2
N$64
  Bottom 0.406: 91.31,14.92 J20_2.4 | 91.31,14.92 90.81,15.37 R27.2 | E$50.1 91.31,14.92
N$65
  Bottom 0.406: 86.23,14.92 88.27,16.95 R26.2 | 86.23,14.92 J20_2.5 | E$48.1 86.23,14.92
N$67
  Bottom 0.406: IC5.7 57.47,27.94 68.26,27.94 R24.2
N$68
  Bottom 0.406: 64.77,26.35 R25.1 | 64.77,26.35 63.5,26.35 IC5.2 | 64.77,26.35 D3.S
N$69
  Top 0.406: IC5.3 60.26,20.57 62.99,20.57 D3.NS
  Bottom 0.406: 64.77,14.92 65.66,13.91 E$45.1 | 64.77,14.92 J21_2.5 | 64.77,14.92 D3.NS
N$70
  Bottom 0.406: 70.74,14.92 J21_2.4 | R25.2 67.31,18.48 70.74,14.92 | E$47.1 70.74,14.92
N$72
  Bottom 0.406: R13.1 30.87,58.15 33.15,55.88 T1.2
N$73
  Bottom 0.61: P1.A 16.51,47.94 | 16.51,47.94 P1.S | 16.51,47.94 16.51,55.5 19.34,58.33 R13.2
N$74
  Top 0.406: E$12.4 18.41,75.56 18.41,65.41 | 18.41,65.41 E$11.4 | 18.41,65.41 18.41,54.86 P2.S
N$83
  Top 0.254: 94.3,45.09
  Top 0.406: R2.4 93.98,44.77 94.3,45.09 E$13.4
N$84
  Bottom 0.406: R2.3 89.53,47.62 94.3,52.39 94.3,52.71 E$13.10
NRST  (via drill 0.5)
  Top 0.254: IC1.7 71.87,48.78 v72.07,48.58
  Bottom 0.254: 94.3,47.63
  Bottom 0.406: v72.07,48.58 74.42,46.23 85.09,46.23 87.63,43.69 87.63,40.64 R1.1 91.95,41.15 91.95,45.28 94.3,47.63 94.3,47.62 E$13.6
PA0
  Top 0.254: E$2.7 58.67,69.6 58.67,64.83 61.59,61.91 64.77,61.91 66.67,60.01 66.67,54.93 68.37,53.23 IC1.14
PA1
  Top 0.254: IC1.15 67.87,52.78 66.04,54.61 66.04,59.69 64.45,61.28 61.28,61.28 58.04,64.52 58.04,67.69 E$2.5
PA2
  Top 0.254: IC1.16 67.37,52.33 65.41,54.29 65.41,59.37 64.14,60.64 60.96,60.64 57.28,64.33 57.28,65.91 E$2.3
PA3
  Top 0.254: E$2.1 60.64,60.01 63.82,60.01 64.77,59.05 64.77,53.98 66.67,52.07 66.67,50.16 66.29,49.78 IC1.17
PA4
  Top 0.254: R30.4 45.72,49.21 E$7.10 46.99,53.98 46.99,55.88 50.16,59.05 57.47,59.05 59.5,57.02 59.5,52.45 63.66,48.29 IC1.20
PA5
  Top 0.254: R30.3 48.26,49.21 E$7.8 E$7.7 48.26,55.56 51.12,58.42 57.15,58.42 58.86,56.71 58.86,52.32 63.4,47.79 IC1.21
PA6
  Top 0.254: E$7.5 50.8,55.56 53.02,57.78 56.83,57.78 58.17,56.45 58.17,52.26 63.14,47.29 IC1.22
PA7
  Top 0.254: R30.2 50.8,49.21 E$7.6 52.07,53.98 52.07,55.88 53.34,57.15 56.52,57.15 57.47,56.2 57.47,52.07 58.86,50.8 62.88,46.79 IC1.23
PA8  (via drill 0.5)
  Top 0.254: IC1.41 71.37,34.86 65.41,28.89 44.26,28.89 43.12,27.75 29.34,27.75 v28.89,28.19
  Bottom 0.406: v28.89,28.19 28.89,35.88 IC2.11
PA9
  Top 0.254: R21.1 46.35,28.26 65.72,28.26 71.87,34.41 IC1.42 71.87,42.02 72.39,42.55 75.06,42.55 76.07,41.53 77.47,41.53 82.04,36.96 89.09,36.96 92.39,33.66
  Top 0.406: 92.39,33.66 E$9.3
PA10
  Top 0.254: R18.1 50.8,27.62 66.04,27.62 72.37,33.95 IC1.43 72.37,41.57 72.71,41.91 74.8,41.91 75.56,41.15 75.56,39.88 79.38,36.07 87.44,36.07 89.85,33.66
  Top 0.406: 89.85,33.66 E$9.5
  Bottom 0.406: IC4.6 37.47,24.45 47.62,24.45 R18.1
PA11
  Top 0.254: IC1.44 72.87,33.49 72.39,33.02 R10.2
PA12
  Top 0.254: IC1.45 73.37,34.58 73.41,27.94 R9.2
PA13
  Top 0.254: 94.3,57.79 94.3,57.78 95.57,56.52 97.47,56.52 98.42,55.56 98.42,31.37 95.89,28.83 78.49,28.83 73.87,33.45 IC1.46
  Top 0.406: E$13.14 94.3,57.78
PA14
  Top 0.254: E$13.12 95.57,53.96 95.57,40.96 95.12,40.51 83.19,40.51 82.42,41.27 78.61,41.27 77.6,42.29 IC1.49
PA15
  Top 0.254: 94.3,60.33 94.27,60.29 93.03,59.05 93.03,46.99 92.08,46.04 88.9,46.04 87.63,44.77 87.63,42.8 86.74,41.91 78.99,41.91 78.12,42.79 IC1.50
  Top 0.406: E$13.16 94.27,60.33 94.27,60.29
PB0
  Top 0.254: E$3.3 47.94,65.72 47.94,61.59 39.05,52.7 39.05,46.99 40.76,45.29 IC1.26
PB1
  Top 0.254: E$3.1 46.35,60.96 38.42,53.02 38.42,46.67 40.3,44.79 IC1.27
PB2  (via drill 0.5)
  Top 0.254: E$12.6 20.95,75.56 20.95,71.12 R33.4 E$11.6 | IC1.28 39.53,44.29 v38.1,45.72 37.47,46.35 37.47,53.02 38.67,54.23 38.67,68.52 v37.34,69.85
  Bottom 0.406: v38.1,45.72 33.66,45.72 IC2.13 | v37.34,69.85 E$15.1 32.38,71.75 24.13,71.75 R33.4
PB3  (via drill 0.5)
  Top 0.254: IC1.55 85.61,45.29 88.9,48.58 90.01,48.58 90.33,48.26 | 90.33,48.26 | 90.33,48.26 90.65,47.94 v92.08,47.94
  Bottom 0.254: v92.08,47.94
  Bottom 0.406: v92.08,47.94 94.3,50.17 | 94.3,50.17 | 94.3,50.17 94.3,50.16 E$13.8
PB4
  Top 0.254: IC1.56 85.16,45.79 88.27,48.9 88.27,53.02 91.12,55.88 91.12,59.69 94.27,62.83 94.3,62.87
  Top 0.406: 94.27,62.87 94.3,62.87 | 94.27,62.83 94.27,62.87 | 94.27,62.87 E$13.18
PB5
  Top 0.254: IC1.57 84.7,46.29 87.63,49.21 87.63,55.56 87.95,55.88 87.95,65.15 85.15,67.94 79.69,67.94 R32.2
  Top 0.406: R32.2 78.11,73.03 E$8.6
PB6
  Top 0.254: IC1.58 84.25,46.79 87,49.53 87,55.88 87.31,56.2 87.31,64.71 84.71,67.31 77.85,67.31 77.22,67.94 R32.3
  Top 0.406: R32.3 75.56,73.03 E$8.8 E$8.7
PB7  (via drill 0.5)
  Top 0.254: IC1.59 83.8,47.29 86.36,49.85 86.36,56.2 86.68,56.52 86.68,64.33 84.58,66.42 v82.3,66.42
  Bottom 0.406: v82.3,66.42 81.41,66.42 79.38,68.45 79.38,71.75 78.11,73.03 78.11,75.56 E$8.5
PB8
  Top 0.254: IC1.61 82.32,48.29 83.82,49.78 D1.NS
  Bottom 0.406: E$37.1 83.57,60.58 81.6,58.61 R11.1 83.82,54.93 D1.NS
PB9
  Top 0.254: IC1.62 81.49,48.79 82.68,49.97 82.68,51.56 83.82,52.7 D1.S
PB10
  Top 0.254: IC1.29 37.18,43.79 36.2,42.8 35.81,42.42 | R7.1 35.81,42.42 | 35.81,42.42 37.08,43.69 37.08,45.15 35.56,46.67 E$34.1
PB11
  Top 0.254: E$35.1 33.97,47.94 33.97,41.59 34.92,40.64 36.32,40.64 R8.1 38.97,43.29 IC1.30
PB12
  Top 0.254: IC1.33 67.37,38.16 66.36,37.15 61.72,37.15 56.83,42.04 47.75,42.04 E$10.9 45.72,38.1 E$10.10 44.45,36.2 R31.4
PB13
  Top 0.254: IC1.34 67.87,37.71 66.67,36.51 61.34,36.51 56.45,41.4 49.72,41.4 48.26,39.94 | R31.3 46.99,36.2 E$10.8 48.26,39.94 | 48.26,39.94 E$10.7
PB14
  Top 0.254: IC1.35 68.37,37.32 66.48,35.43 53.21,35.43 52.07,36.58 52.07,38.73 E$10.5
PB15
  Top 0.254: IC1.36 68.87,36.99 66.48,34.61 50.8,34.61 | R31.2 49.53,33.34 50.8,34.61 | 50.8,34.61 E$10.6
PC0
  Top 0.254: IC1.8 71.37,66.42 E$1.7
PC1
  Top 0.254: IC1.9 70.87,64.39 E$1.5
PC2
  Top 0.254: IC1.10 70.37,62.34 E$1.3
PC3
  Top 0.254: IC1.11 69.87,60.3 E$1.1
PC4
  Top 0.254: IC1.24 41.66,46.29 40.32,47.62 40.32,52.07 49.21,60.96 49.21,69.53 E$3.7
PC5
  Top 0.254: E$3.5 48.58,67.63 48.58,61.28 39.69,52.39 39.69,47.31 41.21,45.79 IC1.25
PC6
  Top 0.254: IC1.37 69.37,36.67 64.14,31.43 40.83,31.43 40.26,30.86 32.64,30.86 32.07,31.43 25.72,31.43 23.18,33.97 23.18,54.1 24.64,55.56 24.64,59.18 22.23,61.59 E$11.5 22.23,63.5 23.5,64.77 23.5,68.58 R33.5
PC7
  Top 0.254: IC1.38 69.87,36.22 64.45,30.8 41.85,30.8 41.15,30.1 32.26,30.1 31.69,30.67 25.53,30.67 22.42,33.78 22.42,54.42 20.95,55.88 20.95,68.58 R33.3
  Bottom 0.406: R33.3 19.68,71.75 E$12.5
PC8  (via drill 0.5)
  Top 0.254: IC1.39 70.37,35.76 64.77,30.16 42.61,30.16 41.78,29.34 31.75,29.34 31.05,30.04 25.21,30.04 21.59,33.66 21.59,48.26 | 21.59,48.26 v21.21,48.26 | 21.59,48.26 21.59,54.23 19.68,56.13 E$11.3
  Bottom 0.406: E$12.3 17.14,71.75 R33.2 17.14,67.31 18.41,66.04 18.41,64.14 E$11.3 | v21.21,48.26 27.62,48.26 28.89,46.99 IC2.14
PC9  (via drill 0.5)
  Top 0.254: IC1.40 70.87,35.31 65.09,29.53 43.43,29.53 42.48,28.57 31.11,28.57 30.48,29.21 27.69,29.21 26.73,28.26 v26.73,28.19
  Bottom 0.406: v26.73,28.19 26.73,36.26 IC2.12
PC10  (via drill 0.5)
  Top 0.254: v84.45,44.13 82.87,42.55 79.38,42.55 78.63,43.29 IC1.51
  Bottom 0.406: 92.39,31.18 92.39,31.11 E$9.4 | E$9.4 93.67,32.38 93.67,34.59 91.06,37.21 89.15,37.21 84.45,41.91 v84.45,44.13 | E$9.4 92.41,30.49 R26.1
PC11  (via drill 0.5)
  Top 0.254: IC1.52 79.02,43.79 79.63,43.18 81.28,43.18 v82.23,44.13
  Top 0.406: IC5.6 60.45,24.32 83.69,24.32 R23.1
  Bottom 0.406: R23.1 85.72,26.42 87.12,27.81 87.76,27.81 89.79,29.84 89.79,31.11 E$9.6 91.14,32.38 91.14,34.7 89.64,36.2 88.65,36.2 82.23,42.61 v82.23,44.13
PC12  (via drill 0.5)
  Top 0.254: 29.21,59.69 E$11.13 33.66,64.14 | E$12.13 32.38,72.87 33.05,72.2 33.05,69.34 33.66,68.74 33.66,64.14 | 29.21,59.69 33.66,64.14 | 29.21,59.69 29.21,41.27 IC2.7 29.46,32.13 32.51,32.13 33.02,31.62 38.99,31.62 39.69,32.32 v39.69,32.38 | IC1.53 71.28,44.29 v70.48,43.5
  Bottom 0.406: v70.48,43.5 67.63,40.64 67.63,32.89 64.33,29.59 54.55,29.59 53.34,30.8 41.27,30.8 v39.69,32.38
PC13
  Top 0.254: IC1.2 74.37,52.49 76.3,54.42 78.99,54.42 80.14,55.56 80.14,66.04 79.5,66.67 76.64,66.67 74.3,69.03 E$8.10
  Bottom 0.406: R32.5 70.48,70.48 E$8.10
PC14
  Top 0.254: IC1.3 73.87,52.91 76.01,55.05 78.68,55.05 79.5,55.88 79.5,65.6 79.06,66.04 76.2,66.04 73.03,69.22 R32.4
  Top 0.406: R32.4 73.03,75.56 E$8.9
PC15  (via drill 0.5)
  Top 0.254: IC1.4 73.37,48.29 66.67,41.59 66.67,38.42 66.04,37.78 62.17,37.78 57.28,42.67 41.59,42.67 v41.05,42.13 | E$7.9 41.91,51.44 R30.5
  Bottom 0.406: R30.5 41.91,42.99 v41.05,42.13
PD0  (via drill 0.5)
  Top 0.254: IC1.5 72.87,53.41 v73.89,54.41
  Bottom 0.406: C1.1 76.71,58.23 Q1.2 73.89,57.82 v73.89,54.41
PD1  (via drill 0.5)
  Top 0.254: IC1.6 72.37,54.33 v72.36,54.41
  Bottom 0.254: Q1.1 74.3,63.02
  Bottom 0.406: C2.1 76.71,63.06 Q1.1 72.36,61.12 v72.36,54.41
PD2  (via drill 0.5)
  Top 0.254: IC1.54 79.36,44.79 v80.01,44.13
  Bottom 0.406: v80.01,44.13 80.01,42.67 83.19,39.5 83.19,26.96 R15.2
S$1
  pour Top (isolate 0.508, no thermals): 0.03,80.06 100.04,80.06 100.01,0 0,0
S$2
  Bottom 0: 0,80 100,80 100,0 0,0 0,80
S$5
  Bottom 0.61: E$8.4 E$8.3 | E$29.1 81.92,73.33 E$8.4 | R32.1 81.92,70.8 E$8.4
USB1
  Top 0.406: R10.1 70.64,16.99 19.53,16.99 18.89,16.35 9.37,16.35 J22.2
USB2
  Top 0.406: R14.1 R9.1 76.2,17.46 76.2,15.3 72.9,12 72.9,5.71 71.31,4.13 14.29,4.13 7.64,10.78 J22.3

## Text on the board
Bottom: J5C | J5B | J5A | J19 | J15A | J3 | J15B | J16 | J11 | (c) midibox.org | J22
tNames: SI | Vs | V0 | RW | D0 | D2 | D4 | D6 | B+ | R | C | 2 | SC | Vd | Vs | J5C | J5B | J5A | Vd | Vd | Vd | J19 | J15A | 5v | RS | E | D1 | D3 | D5 | D7 | B- | A8 | A4 | A0 | R | C | 1 | SC | SO | Vd | Vs | A9 | A5 | A1 | J3 | J27 | Vs | 0 | Vs | Vs | 1 | A6 | A2 | 3 | v | 3 | S | E | L | 5 | v | » | Vs | V0 | RW | D0 | D2 | D4 | D6 | B+ | A | J26 | 1 | A7 | A3 | » | 3 | 3 | 1 | v | v | A | 3 | 3 | R | S | J15B | 5v | RS | E | D1 | D3 | D5 | D7 | B- | T | J23 | I | J18 | D | T | M | S | R | C | 2 | SC | SI | Vd | Vs | T | C | K | T | 5v | T | J16 | R | Vs | SD | 1 | » | O | R | C | 1 | SC | SO | Vd | Vs | D | J4 | T | SC | S | R | 3 | v | 3 | S | E | L | 5 | v | S | Vs | » | J24 | RQ | C9 | K | SI | C | RC | SC | Vd | Vs | A | J9 | J8 | RC | SC | SO | Vd | Vs | Vs | Vs | M | I | 1 | M | O | 1 | 5V | MBHP_CORE | 3 | v | 3 | S | E | L | 5 | v | J11 | J25 | J1 | » | STM32_R1 | Vs | Vs | M | O | 2 | 5V | (c) midibox.org | M | I | 2 | 5v | Vs | USB | POWER | OPTION | J17 | J2 | IN1 | OUT1 | IN2 | OUT2 | M- | M+ | M- | Vs | Vs | M+ | M- | M+ | M- | Vs | M+
_tsilk: Vs | Vs | Vs | Vs | V0 | V0 | V0 | V0 | RW | RW | RW | RW | D0 | D0 | D0 | D0 | D2 | D2 | D2 | D2 | D4 | D4 | D4 | D4 | D6 | D6 | D6 | D6 | B+ | B+ | B+ | B+ | J5C | J5B | J5A | RC2 | RC2 | RC2 | RC2 | SC | SC | SC | SC | SI | SI | SI | SI | 5V | 5V | 5V | 5V | Vs | Vs | Vs | Vs | Vd | Vd | Vd | Vd | Vs | Vs | Vs | Vs | Vd | Vd | Vd | Vd | Vs | Vs | Vs | Vs | Vd | Vs | Vs | Vs | Vs | J15A | J15A | Vs | Vs | Vs | Vs | A8 | A8 | A8 | A8 | Vs | Vs | Vs | Vs | A4 | A4 | A4 | A4 | Vs | Vs | Vs | Vs | A0 | A0 | A0 | A0 | J19 | RC1 | RC1 | RC1 | RC1 | SC | SC | SC | SC | SO | SO | SO | SO | 5V | 5V | 5V | 5V | Vs | Vs | Vs | Vs | R33 | 5V | 5V | 5V | 5V | RS | RS | RS | RS | E | E | E | E | D1 | D1 | D1 | D1 | D3 | D3 | D3 | D3 | J27 | D5 | D5 | D5 | D5 | D7 | D7 | D7 | D7 | B- | B- | B- | B- | C12 | Vs | Vs | Vs | Vs | A9 | A9 | A9 | A9 | Vs | Vs | Vs | Vs | A5 | A5 | A5 | A5 | Vs | Vs | Vs | Vs | A1 | A1 | A1 | A1 | J3 | A10 | A10 | A10 | A10 | Vs | Vs | Vs | Vs | Vs | Vs | Vs | Vs | A6 | A6 | A6 | A6 | Vs | Vs | Vs | Vs | A2 | A2 | A2 | A2 | R32 | 3.3V | 3.3V | 3.3V | 3.3V | Sel | Sel | Sel | Sel | 5V | 5V | 5V | 5V | Vs | Vs | Vs | Vs | V0 | V0 | V0 | V0 | RW | RW | RW | RW | D0 | D0 | D0 | D0 | D2 | D2 | D2 | D2 | D4 | D4 | D4 | D4 | D6 | D6 | D6 | D6 | B+ | B+ | B+ | B+ | J3 | J15B | Vs | Vs | Vs | Vs | A11 | A11 | A11 | A11 | Vs | Vs | Vs | Vs | A7 | A7 | A7 | A7 | Vs | Vs | Vs | Vs | A3 | A3 | A3 | A3 | C2 | IC7 | C13 | 3.3V | 3.3V | TRST | TRST | TRST | TRST | J15B | Q1 | Vs | Vs | Vs | Vs | T1 | 5V | RS | E | D1 | D1 | D1 | D1 | D3 | D3 | D3 | D3 | D5 | D5 | D5 | D5 | D7 | D7 | D7 | D7 | B- | B- | B- | B- | J18 | CAN | CAN | CAN | CAN | R11 | TDI | TDI | TDI | TDI | Vs | Vs | Vs | Vs | P2 | J5C | J5B | J5A | C10 | RC2 | RC2 | RC2 | RC2 | SC | SC | SC | SC | SI | SI | SI | SI | Vd | Vd | Vd | Vd | Vs | Vs | Vs | Vs | J23 | TMS | TMS | TMS | TMS | Vs | Vs | Vs | Vs | R13 | R12 | C3 | TCK | TCK | TCK | TCK | J4 | C17 | C1 | Vs | Vs | Vs | Vs | IC6 | 5V | 5V | 5V | 5V | J16 | RT | RT | RT | RT | Vs | Vs | Vs | Vs | SD | SD | SD | SD | RC1 | RC1 | RC1 | RC1 | SC | SC | SC | SC | SO | SO | SO | SO | Vd | Vd | Vd | Vd | Vs | Vs | Vs | Vs | C6 | 1 | 1 | 1 | 1 | D1 | J16 | P1 | C5 | TDO | TDO | TDO | TDO | Vs | Vs | Vs | Vs | SC | SC | SC | SC | 3.3V | 3.3V | 3.3V | 3.3V | Sel | Sel | Sel | Sel | 5V | 5V | 5V | 5V | R2 | Vs | Vs | Vs | Vs | R30 | IC1 | C16 | Vs | Vs | Vs | Vs | have fun! | have fun! | have fun! | have fun! | RQ | RQ | RQ | RQ | Vs | Vs | Vs | Vs | IC2 | J9 | C9 | C11 | RC | RC | RC | RC | SC | SC | SC | SC | SI | SI | SI | SI | Vd | Vd | Vd | Vd | Vs | Vs | Vs | Vs | Vs | Vs | Vs | Vs | R7 | R8 | J9 | J9 | J9 | J9 | ACK | ACK | ACK | ACK | J8 | J8 | J8 | J8 | C7 | R1 | J8 | ~ | RC | RC | RC | RC | SC | SC | SC | SC | SO | SO | SO | SO | Vd | Vd | Vd | Vd | Vs | Vs | Vs | Vs | C4 | X1 | C8 | Vs | Vs | Vs | Vs | Vs | Vs | Vs | Vs | MI1 | MI1 | MI1 | MI1 | MO1 | MO1 | MO1 | MO1 | 5V | 5V | 5V | 5V | C14 | J11 | ~ | MBHP_CORE | MBHP_CORE | MBHP_CORE | MBHP_CORE | R31 | 3.3V | 3.3V | 3.3V | 3.3V | Sel | Sel | Sel | Sel | 5V | 5V | 5V | 5V | J11 | STM32_V2a | Vs | Vs | Vs | Vs | Vs | Vs | Vs | Vs | MI2 | MI2 | MI2 | MI2 | MO2 | MO2 | MO2 | MO2 | 5V | 5V | 5V | 5V | J1 | (c) midibox.org | (c) midibox.org | (c) midibox.org | (c) midibox.org | AC/DC | INPUT | J2 | R15 | +5V | +5V | +5V | +5V | IC4 | IC5 | J17 | D2 | R20 | R19 | R21 | R22 | R18 | D3 | R25 | R24 | R10 | R14 | R9 | LED1 | R23 | R26 | R27 | USB | USB | USB | USB | POWER | POWER | POWER | POWER | OPTION | OPTION | OPTION | OPTION | Vs | Vs | Vs | Vs | IN1 | IN1 | IN1 | IN1 | OUT1 | OUT1 | OUT1 | OUT1 | IN2 | IN2 | IN2 | IN2 | OUT2 | OUT2 | OUT2 | OUT2 | J22 | USB | USB | USB | USB | M+ | M+ | M+ | M+ | M- | M- | M- | M- | M+ | M+ | M+ | M+ | Vs | Vs | Vs | Vs | M- | M- | M- | M- | M+ | M+ | M+ | M+ | M- | M- | M- | M- | M+ | M+ | M+ | M+ | Vs | Vs | Vs | Vs | M- | M- | M- | M-